# Altium PCB CAN_Optical.PcbDoc (part 1 of 2)
Units mm, origin at the board's own origin, x right, y up, seen from the top; angles counter-clockwise.
Board outline 152.4 x 127 mm, 4 copper layers (Top Layer, Power Plane, Ground Plane, Bottom Layer), stack 0.603 mm thick; 133 components, 52 nets, 740 pads, 182 vias.
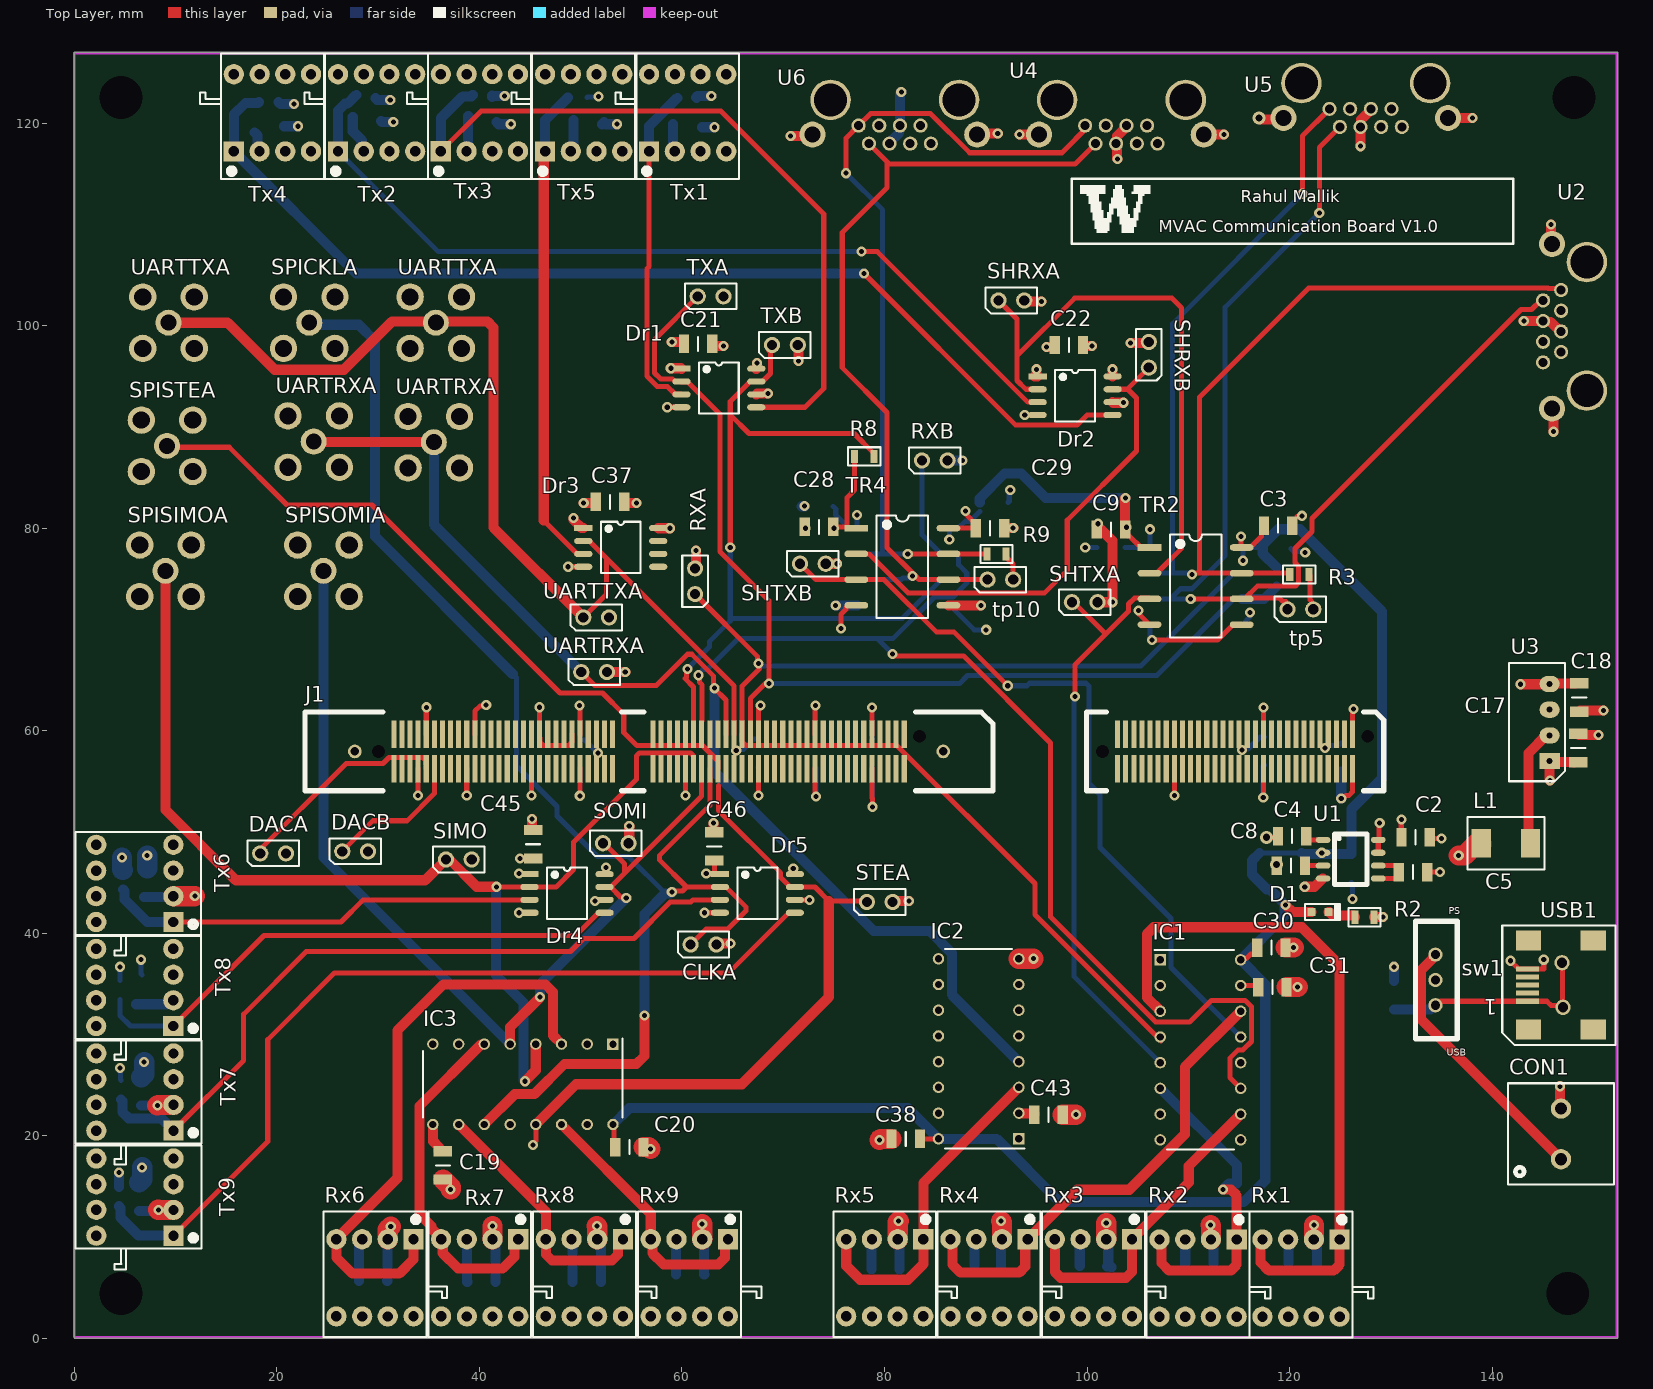
[diagram p0: Top Layer view]
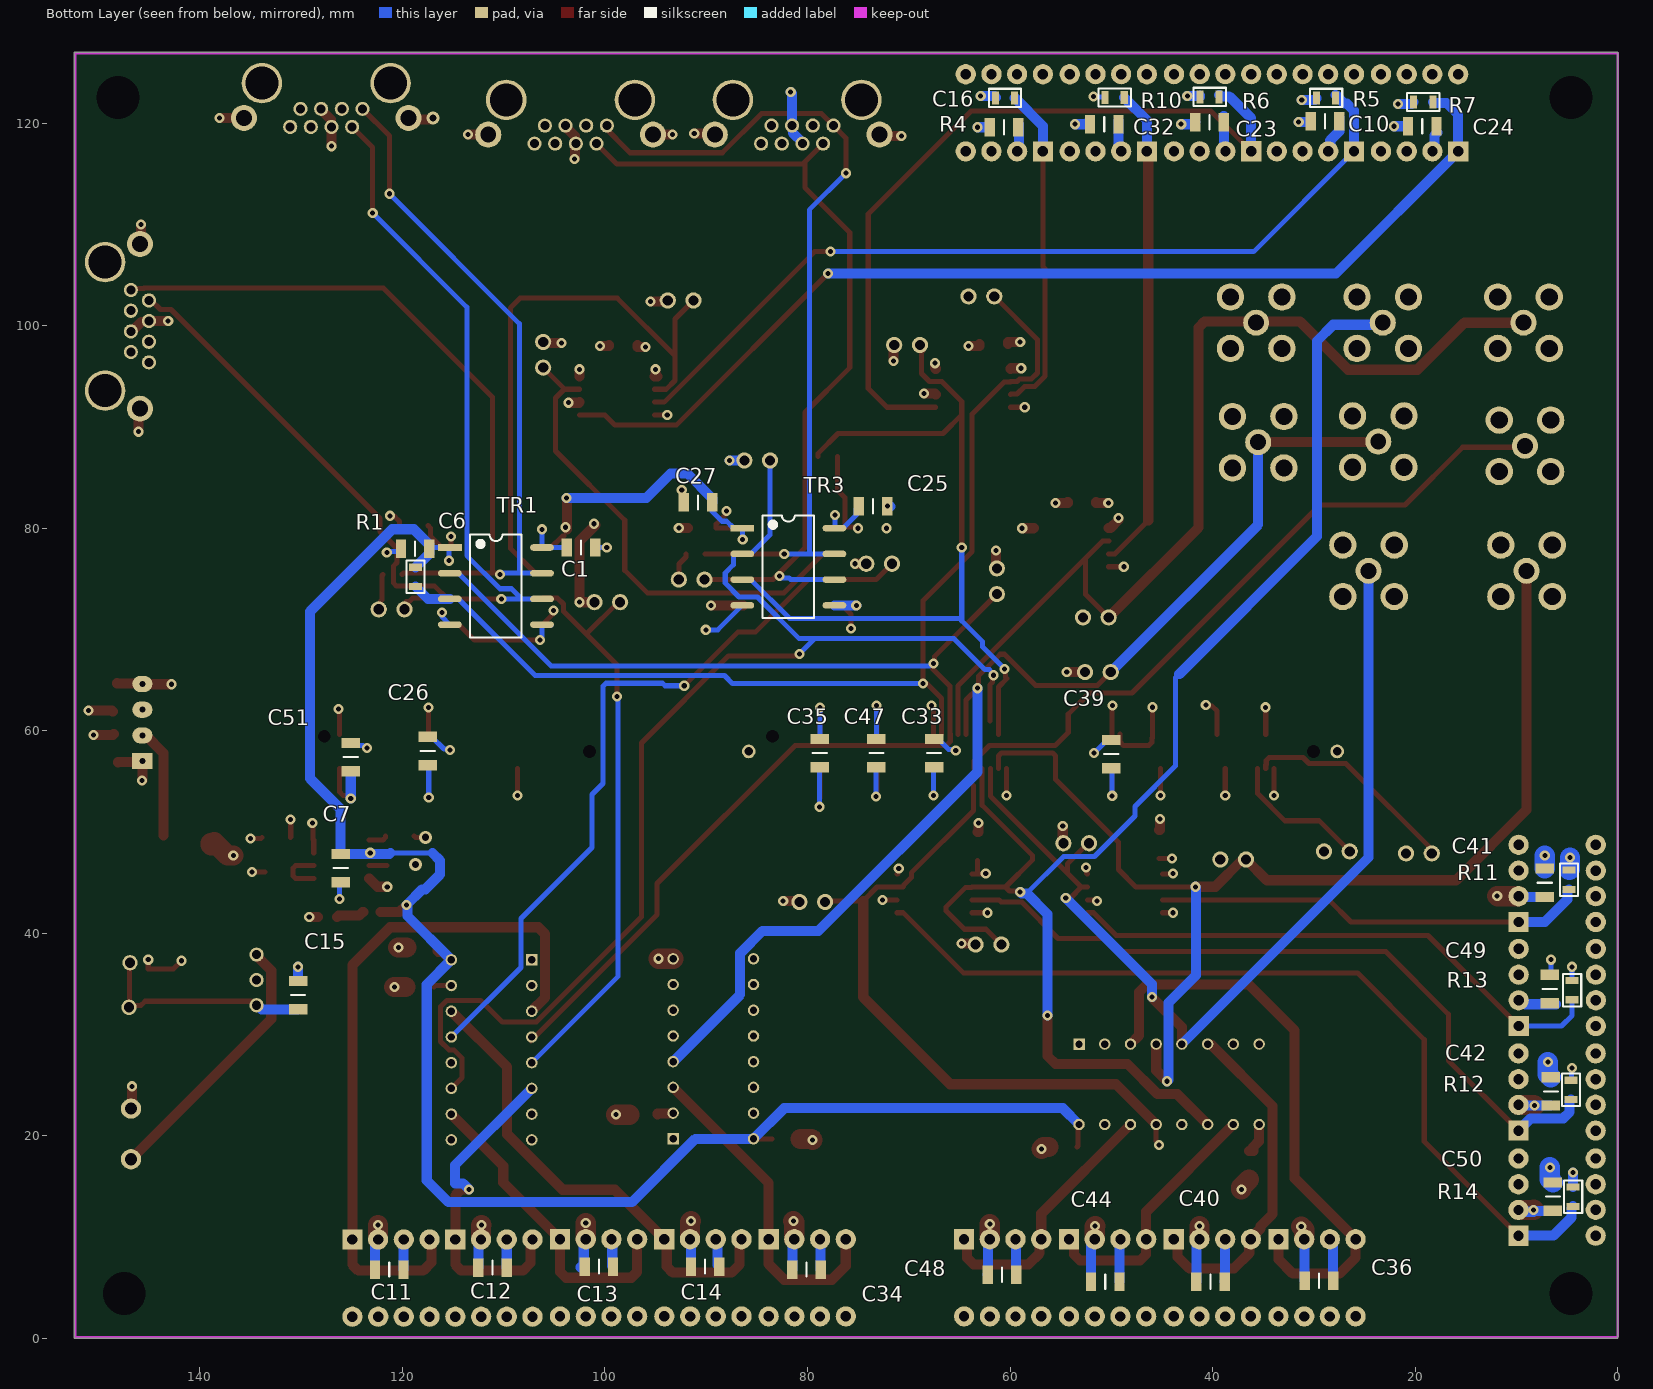
[diagram p1: Bottom Layer view, seen from below]
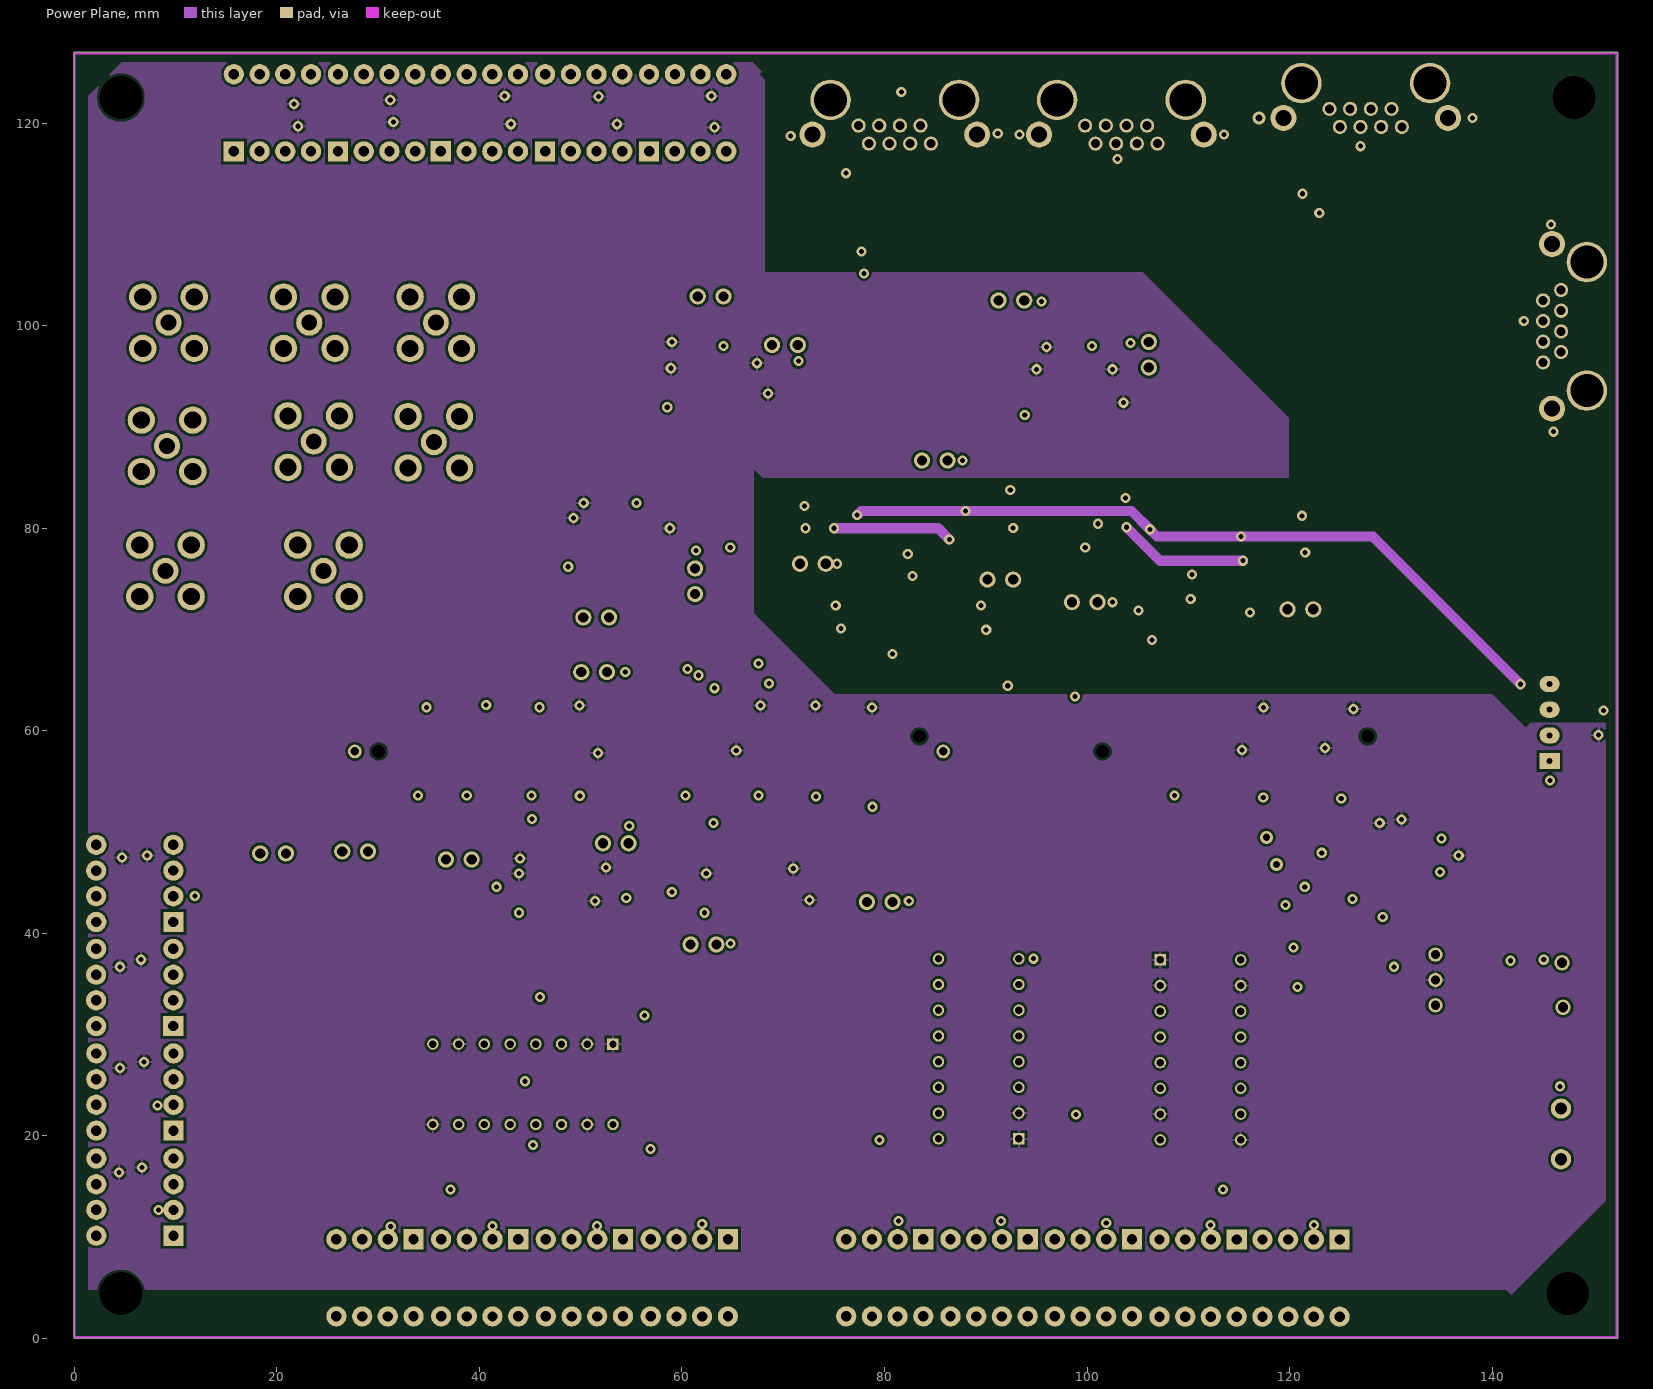
[diagram p2: Power Plane]
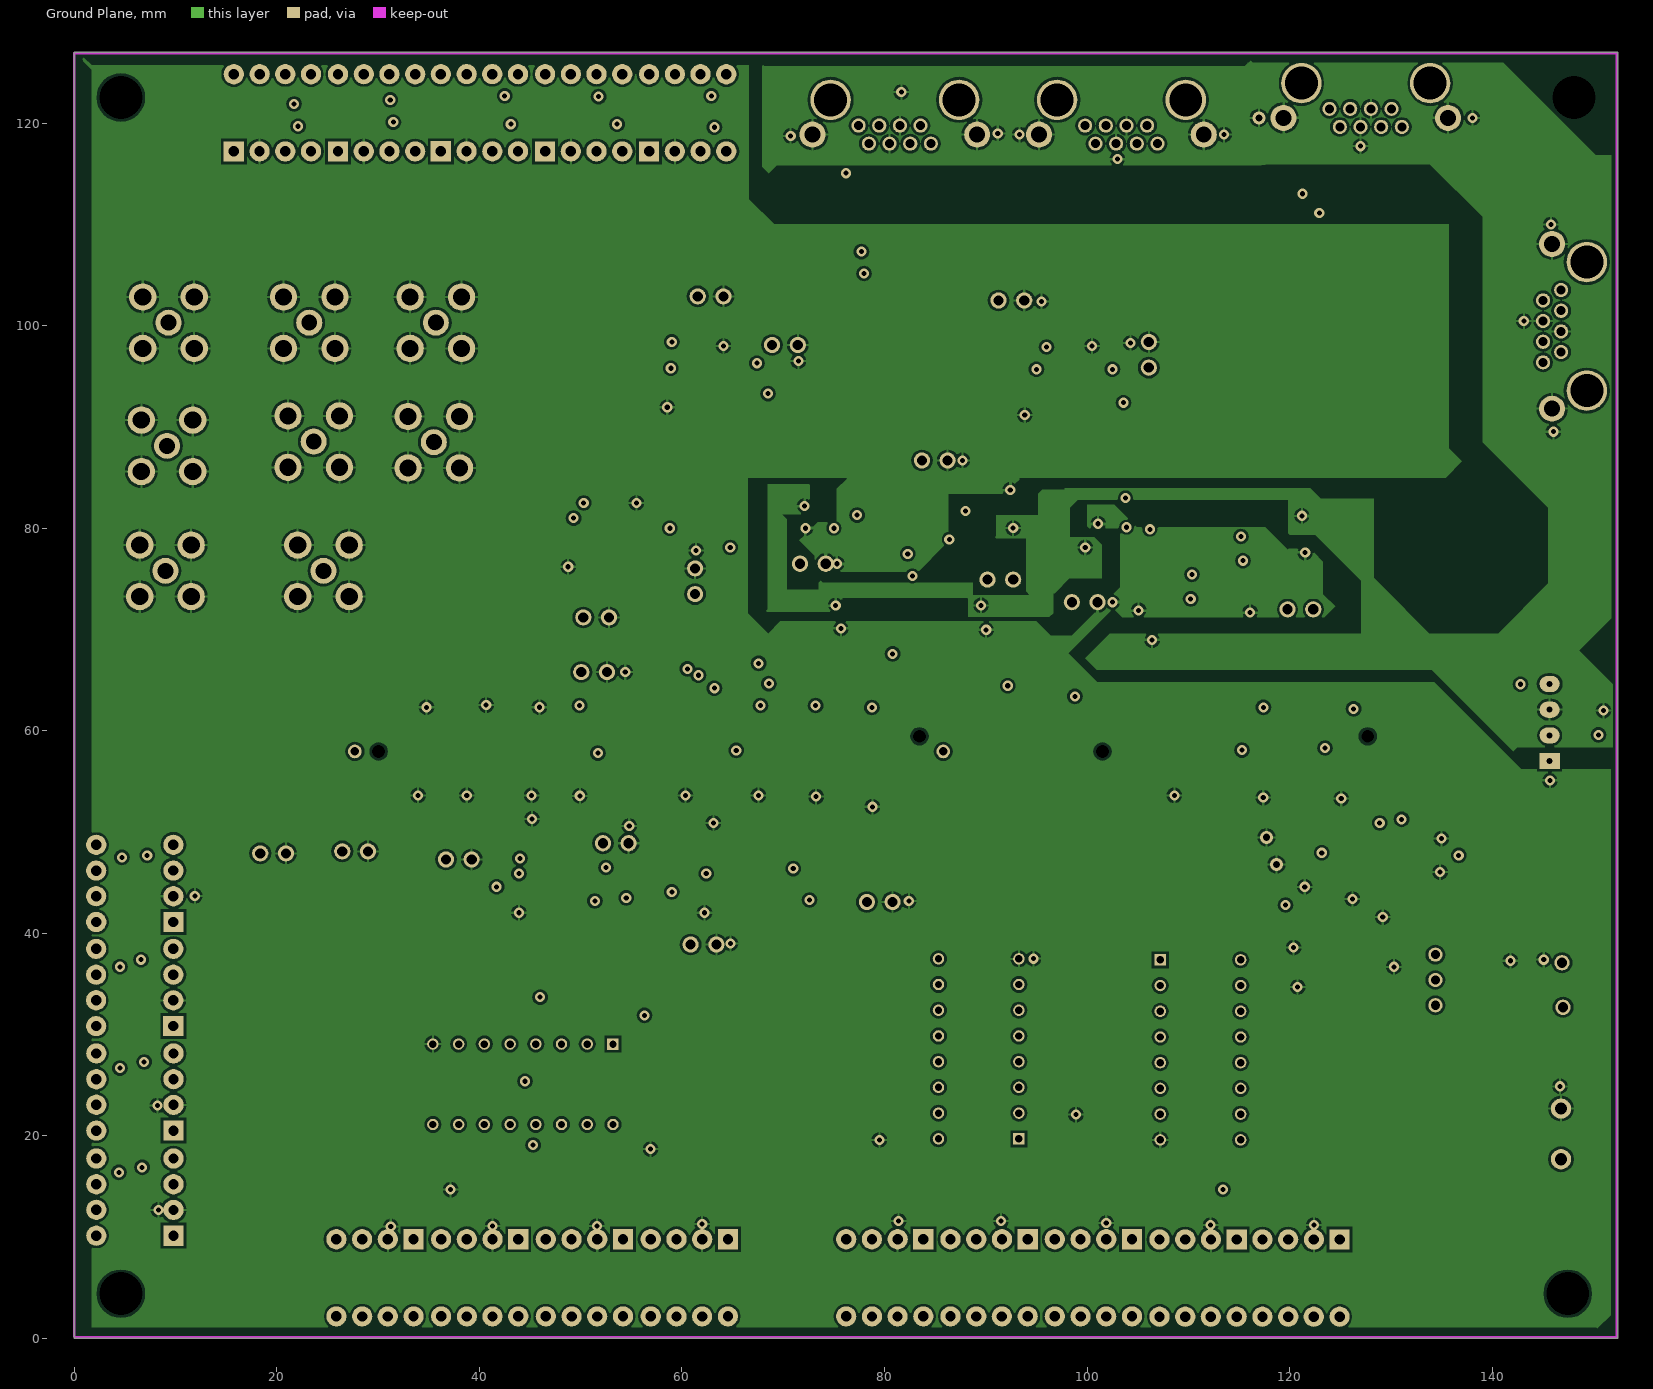
[diagram p3: Ground Plane]
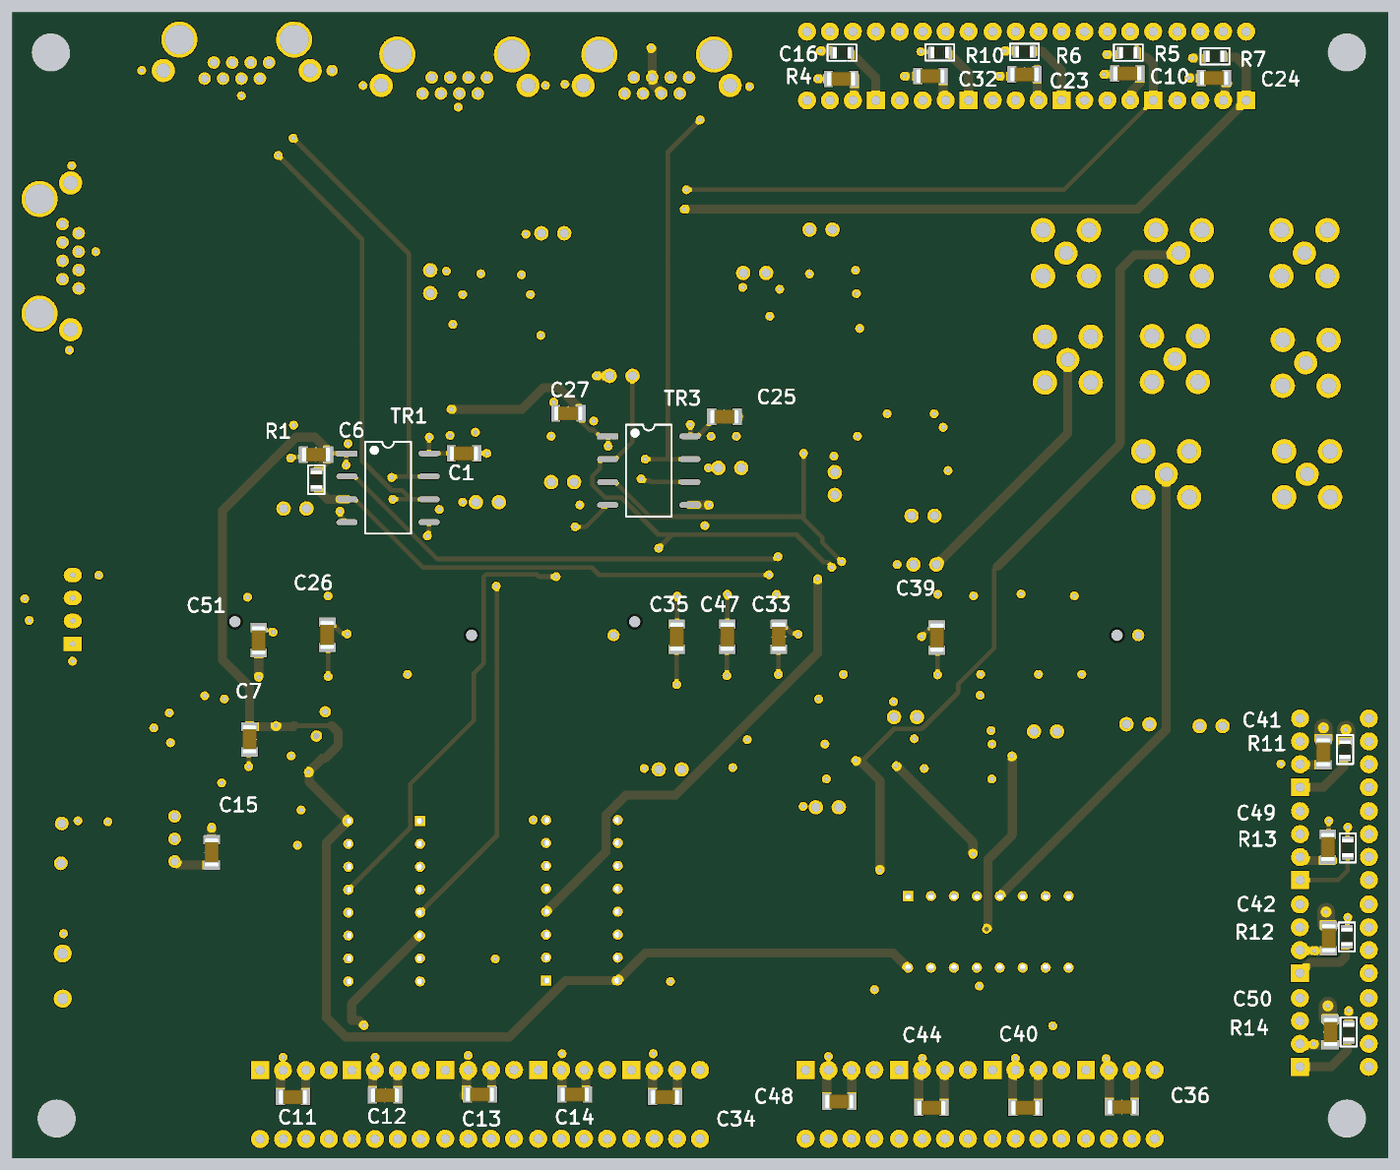
[diagram p5: 3D render of the assembled board from below, using the file's embedded part models]

## Layer stack, top to bottom
Top Solder: solder mask 0.0102, Solder Resist, Dk 3.5
Top Layer: signal copper 0.0356
Dielectric 2: prepreg 0.0711, PP-006, Dk 4.1
Power Plane: signal copper 0.035
Dielectric 1: dielectric 0.32, FR-4, Dk 4.8
Ground Plane: signal copper 0.035
Dielectric 3: prepreg 0.0711, PP-006, Dk 4.1
Bottom Layer: signal copper 0.0356
Bottom Solder: solder mask 0.0102, Solder Resist, Dk 3.5

## Board outline
0,0 152.4,0 152.4,127 0,127

## Design rules (kind name [scope] priority, off if disabled: settings)
Clearance [All] p1: gap=0.254 ignorepadtopadclearanceinfootprint=FALSE
ComponentClearance [All] p1 off: gap=0.254 collisioncheckmode=3 verticalgap=0.254 showdistances=FALSE
Height [All] p1 off: minheight=0 maxheight=25.4 prefheight=12.7
MinimumSolderMaskSliver [All] p1: minsoldermaskwidth=0.025
PolygonConnect [All] p1: connectstyle=Relief reliefconductorwidth=0.254 reliefentries=4 polygonreliefangle="90 Angle" airgapwidth=0.254
RoutingVias [All] p1: holewidth=0.5 width=1 viastyle="Through Hole" minholewidth=0.5 minwidth=1 maxholewidth=0.5 maxwidth=1
SilkToSilkClearance [All] p1: silktosilkclearance=0.025
SilkToSolderMaskClearance [IsPad] p1: minsilkscreentomaskgap=0.051 clearancetoexposedcopper=TRUE
SolderMaskExpansion [All] p1: expansion=0.102
Width [All] p1: maxlimit=2 minlimit=0.5 preferedwidth=1
25 further rules are at their usual default settings.

## Components (designator, comment, footprint, x,y, rotation, side; value= is the part's Value field where it differs from the comment)
C1 "C1206C104J5JACTU" CAPC3216X135N 102.359,78.105 r180 bottom
C2 "C1206C104J5JACTU" CAPC3216X135N 132.449,49.482 r0 top
C3 "C1206C104J5JACTU" CAPC3216X135N 118.872,80.264 r0 top
C4 "C1206C104J5JACTU" CAPC3216X135N 120.257,49.609 r180 top
C5 "C1206C104J5JACTU" CAPC3216X135N 132.195,46.053 r0 top
C6 "C1206C104J5JACTU" CAPC3216X135N 118.745,77.978 r0 bottom
C7 "C1206C104J5JACTU" CAPC3216X135N 126.099,46.434 r270 bottom
C8 "C1206C104J5JACTU" CAPC3216X135N 120.13,46.688 r180 top
C9 "C1206C104J5JACTU" CAPC3216X135N 102.365,79.883 r180 top
C10 "10uF" CAPC3216X135N 28.9,120.2 r180 bottom
C11 "0.1uF" CAPC3216X135N 121.3,6.8 r0 bottom
C12 "0.1uF" CAPC3216X135N 111.1,7 r0 bottom
C13 "0.1uF" CAPC3216X135N 100.6,7.1 r0 bottom
C14 "0.1uF" CAPC3216X135N 90.1,7.1 r0 bottom
C15 "C1206C104J5JACTU" CAPC3216X135N 130.3,33.9 r90 bottom
C16 "C1206C104J5JACTU" CAPC3216X135N 60.6,119.6 r180 bottom
C17 "C1206C104J5JACTU" CAPC3216X135N 148.5,58.3 r270 top
C18 "C1206C104J5JACTU" CAPC3216X135N 148.6,63.3 r270 top
C19 "C1206C104J5JACTU" CAPC3216X135N 36.4,17.1 r270 top
C20 "C1206C104J5JACTU" CAPC3216X135N 54.8,18.9 r0 top
C21 "C1206C104J5JACTU" CAPC3216X135N 61.6,98.2 r0 top
C22 "C1206C104J5JACTU" CAPC3216X135N 98.2,98.1 r0 top
C23 "C1206C104J5JACTU" CAPC3216X135N 40.3,120.1 r180 bottom
C24 "C1206C104J5JACTU" CAPC3216X135N 19.3,119.7 r180 bottom
C25 "C1206C104J5JACTU" CAPC3216X135N 73.53,82.169 r180 bottom
C26 "C1206C104J5JACTU" CAPC3216X135N 117.5,58 r270 bottom
C27 "C1206C104J5JACTU" CAPC3216X135N 90.805,82.55 r0 bottom
C28 "C1206C104J5JACTU" CAPC3216X135N 73.536,80.137 r180 top
C29 "C1206C104J5JACTU" CAPC3216X135N 90.424,80.01 r0 top
C30 "C1206C104J5JACTU" CAPC3216X135N 118.2,38.6 r0 top
C31 "C1206C104J5JACTU" CAPC3216X135N 118.3,34.7 r0 top
C32 "C1206C104J5JACTU" CAPC3216X135N 50.7,119.9 r180 bottom
C33 "C1206C104J5JACTU" CAPC3216X135N 67.5,57.8 r270 bottom
C34 "C1206C104J5JACTU" CAPC3216X135N 80.1,6.8 r0 bottom
C35 "C1206C104J5JACTU" CAPC3216X135N 78.8,57.8 r270 bottom
C36 "C1206C104J5JACTU" CAPC3216X135N 29.5,5.7 r0 bottom
C37 "C1206C104J5JACTU" CAPC3216X135N 52.9,82.6 r0 top
C38 "C1206C104J5JACTU" CAPC3216X135N 82.1,19.7 r180 top
C39 "C1206C104J5JACTU" CAPC3216X135N 50,57.7 r270 bottom
C40 "C1206C104J5JACTU" CAPC3216X135N 40.2,5.6 r0 bottom
C41 "C1206C104J5JACTU" CAPC3216X135N 7.2,45 r270 bottom
C42 "C1206C104J5JACTU" CAPC3216X135N 6.6,24.4 r270 bottom
C43 "C1206C104J5JACTU" CAPC3216X135N 96.2,22.1 r0 top
C44 "C1206C104J5JACTU" CAPC3216X135N 50.6,5.6 r0 bottom
C45 "C1206C104J5JACTU" CAPC3216X135N 45.3,48.8 r90 top
C46 "C1206C104J5JACTU" CAPC3216X135N 63.2,48.6 r90 top
C47 "C1206C104J5JACTU" CAPC3216X135N 73.2,57.8 r270 bottom
C48 "C1206C104J5JACTU" CAPC3216X135N 60.8,6.3 r0 bottom
C49 "C1206C104J5JACTU" CAPC3216X135N 6.7,34.5 r270 bottom
C50 "C1206C104J5JACTU" CAPC3216X135N 6.4,14 r270 bottom
C51 "C1206C104J5JACTU" CAPC3216X135N 125.1,57.4 r270 bottom
CLKA "tp2" tp2 60.86,38.9 r0 top (schematic designator tp15)
CON1 "ED700/2" ED700/2 146.8,17.7 r90 top
D1 "GREEN" LED0603G 123,42.1 r180 top
DACA "tp2" tp2 18.36,47.9 r0 top (schematic designator tp17)
DACB "tp2" tp2 26.46,48.1 r0 top (schematic designator tp18)
Dr1 "SN75451BPSRG4" SN75451BPS 59.944,95.758 r0 top
Dr2 "SN75451BPSRG4" SN75451BPS 95.123,94.996 r0 top
Dr3 "SN75451BPSRG4" SN75451BPS 50.258,80.01 r0 top
Dr4 "SN75451BPSRG4" SN75451BPS 44.958,45.847 r0 top
Dr5 "SN75451BPSRG4" SN75451BPS 63.754,45.847 r0 top
IC1 "CD40109BE" DIP794W53P254L1930H508Q16N 111.2,28.5 r0 top
IC2 "CD40109BE" DIP794W53P254L1930H508Q16N 89.3,28.6 r180 top
IC3 "CD40109BE" DIP794W53P254L1930H508Q16N 44.3,25.1 r270 top
J1 "HEADER_HSEC8_180_VERT" HEADER_HSEC8_180_DV 31.552,56.261 r0 top
L1 "IHLP2020BZER4R7M11" L_IHLP2020BZER4R7M11 141.351,48.895 r0 top
R1 "10K" "R0805 - duplicate - duplicate" 118.7,75.2 r270 bottom
R2 "360R" "R0805 - duplicate - duplicate" 127.4,41.6 r180 top
R3 "120R" "R0805 - duplicate - duplicate" 120.965,75.438 r0 top
R4 "100R" "R0805 - duplicate - duplicate" 60.5,122.5 r180 bottom
R5 "100R" "R0805 - duplicate - duplicate" 28.8,122.5 r180 bottom
R6 "100R" "R0805 - duplicate - duplicate" 40.3,122.6 r180 bottom
R7 "100R" "R0805 - duplicate - duplicate" 19.2,122.1 r180 bottom
R8 "10K" "R0805 - duplicate - duplicate" 78,87.1 r0 top
R9 "120R" "R0805 - duplicate - duplicate" 91.059,77.47 r0 top
R10 "100R" "R0805 - duplicate - duplicate" 49.675,122.525 r180 bottom
R11 "100R" "R0805 - duplicate - duplicate" 4.8,45.3 r270 bottom
R12 "100R" "R0805 - duplicate - duplicate" 4.6,24.55 r270 bottom
R13 "100R" "R0805 - duplicate - duplicate" 4.5,34.4 r270 bottom
R14 "100R" "R0805 - duplicate - duplicate" 4.4,14 r270 bottom
Rx1 "HFBR-2521Z" HFBRX5XXZ 124.94,9.775 r270 top
Rx2 "HFBR-2521Z" HFBRX5XXZ 114.775,9.775 r270 top
Rx3 "HFBR-2521Z" HFBRX5XXZ 104.44,9.8 r270 top
Rx4 "HFBR-2521Z" HFBRX5XXZ 94.14,9.8 r270 top
Rx5 "HFBR-2521Z" HFBRX5XXZ 83.84,9.8 r270 top
Rx6 "HFBR-2521Z" HFBRX5XXZ 33.5,9.8 r270 top
Rx7 "HFBR-2521Z" HFBRX5XXZ 43.84,9.8 r270 top
Rx8 "HFBR-2521Z" HFBRX5XXZ 54.18,9.8 r270 top
Rx9 "HFBR-2521Z" HFBRX5XXZ 64.54,9.8 r270 top
RXA "tp2" tp2 61.3,73.5 r90 top (schematic designator tp1)
RXB "tp2" tp2 83.7,86.7 r0 top (schematic designator tp6)
SHRXA "tp2" tp2 91.26,102.5 r0 top (schematic designator tp2)
SHRXB "tp2" tp2 106.1,95.86 r90 top (schematic designator tp7)
SHTXA "tp2" tp2 98.5,72.7 r0 top (schematic designator tp4)
SHTXB "tp2" tp2 71.66,76.5 r0 top (schematic designator tp9)
SIMO "tp2" tp2 36.7,47.3 r0 top (schematic designator tp13)
SOMI "tp2" tp2 52.2,48.9 r0 top (schematic designator tp14)
SPICKLA "142-0701-201" 142-0701-201 23.2,100.3 r0 top (schematic designator sma13)
SPISIMOA "142-0701-201" 142-0701-201 9,75.8 r0 top (schematic designator sma11)
SPISOMIA "142-0701-201" 142-0701-201 24.6,75.8 r0 top (schematic designator sma12)
SPISTEA "142-0701-201" 142-0701-201 9.16,88.14 r0 top (schematic designator sma14)
STEA "tp2" tp2 78.26,43.1 r0 top (schematic designator tp16)
sw1 "EG1218" EG1218 134.4,37.9 r270 top
tp5 "tp2" tp2 119.8,72 r0 top
tp10 "tp2" tp2 90.17,74.93 r0 top
TR1 "Transceiver" RXTX_ISO1050 115.316,78.105 r180 bottom
TR2 "Transceiver" RXTX_ISO1050 106.172,78.105 r0 top
TR3 "Transceiver" RXTX_ISO1050 86.443,80.01 r180 bottom
TR4 "Transceiver" RXTX_ISO1050 77.216,80.01 r0 top
Tx1 "HFBR-1527Z" HFBRX5XXZ 56.759,117.216 r90 top
Tx2 "HFBR-1527Z" HFBRX5XXZ 26.04,117.216 r90 top
Tx3 "HFBR-1527Z" HFBRX5XXZ 36.195,117.221 r90 top
Tx4 "HFBR-1527Z" HFBRX5XXZ 15.753,117.216 r90 top
Tx5 "HFBR-1527Z" HFBRX5XXZ 46.487,117.216 r90 top
Tx6 "HFBR-1527Z" HFBRX5XXZ 9.784,41.123 r180 top
Tx7 "HFBR-1527Z" HFBRX5XXZ 9.798,20.525 r180 top
Tx8 "HFBR-1527Z" HFBRX5XXZ 9.779,30.846 r180 top
Tx9 "HFBR-1527Z" HFBRX5XXZ 9.798,10.15 r180 top
TXA "tp2" tp2 61.56,102.9 r0 top (schematic designator tp3)
TXB "tp2" tp2 68.9,98.1 r0 top (schematic designator tp8)
U1 "ADM7154ARDZ-3.3-R7" ADM7154ARDZ-3.3-R7 126.03,47.323 r0 top
U2 "1-406541-1" 1-406541-1 145.032,96.381 r90 top
U3 "ROE-0505S" RECOM_DCDC 145.682,60.82 r180 top
U4 "1-406541-1" 1-406541-1 106.954,117.981 r180 top
U5 "1-406541-1" 1-406541-1 131.084,119.632 r180 top
U6 "1-406541-1" 1-406541-1 84.582,117.983 r180 top
UARTRXA "tp2" tp2 50.06,65.8 r0 top (schematic designator tp12)
UARTRXA "142-0701-201" 142-0701-201 23.64,88.56 r0 top (schematic designator sma16)
UARTRXA "142-0701-201" 142-0701-201 35.5,88.5 r0 top (schematic designator sma10)
UARTTXA "tp2" tp2 50.26,71.2 r0 top (schematic designator tp11)
UARTTXA "142-0701-201" 142-0701-201 35.7,100.3 r0 top (schematic designator sma15)
UARTTXA "142-0701-201" 142-0701-201 9.3,100.3 r0 top (schematic designator sma9)
USB1 "1734035-3" ? 143.5,34.9 r90 top

## Footprints (in the part's own frame and the unit in brackets; to place one, negate y for a bottom-side part, rotate by r counter-clockwise, add the part's x,y. Pads: shape width x height; smd on the part's side, far side on the other; paste and mask are expansions set on the pad)
1-406541-1 [mm] "Jack Modular Connector 8p8c (RJ45, Ethernet) 90° Angle (Right) Shielded, EMI Finger Cat5"
  round 1.4 hole 0.89: 1(7.14,-1.78) 2(6.12,0) 3(5.1,-1.78) 4(4.08,0) 5(3.06,-1.78) 6(2.04,0) 7(1.02,-1.78) 8(0,0)
  round 2.57 hole 1.57: 9(-4.57,-0.89) 9(11.69,-0.89)
  round 4 hole 3.25: 10(-2.79,-4.32) 10(9.91,-4.32)
142-0701-201 [mm]
  round 2.57 hole 1.57: 1(0,0)
  round 2.7 hole 1.7: 2(-2.54,-2.54) 2(-2.54,2.54) 2(2.54,-2.54) 2(2.54,2.54)
ADM7154ARDZ-3.3-R7 [mm]
  oval 1.45x0.6 smd: 1(-2.725,1.905) 2(-2.725,0.635) 3(-2.725,-0.635) 4(-2.725,-1.905) 5(2.725,-1.905) 6(2.725,-0.635) 7(2.725,0.635) 8(2.725,1.905)
  silkscreen extent -1.6,-2.5 1.6,2.5, body extent -2,-2.5 2,2.5, height 0.8
CAPC3216X135N [mm]
  rect 1.02x1.82 smd: 1(-1.4,0) 2(1.4,0)
  silkscreen extent 0,-0.7 0,0.7, body extent -1.6,-0.8 1.6,0.8, height 1.35
DIP794W53P254L1930H508Q16N [mm]
  rect 1.13x1.13 hole 0.73: 1(-3.97,8.89)
  round 1.13 hole 0.73: 2(-3.97,6.35) 3(-3.97,3.81) 4(-3.97,1.27) 5(-3.97,-1.27) 6(-3.97,-3.81) 7(-3.97,-6.35) 8(-3.97,-8.89) 9(3.97,-8.89) 10(3.97,-6.35) 11(3.97,-3.81) 12(3.97,-1.27) 13(3.97,1.27) 14(3.97,3.81) 15(3.97,6.35) 16(3.97,8.89)
  silkscreen extent -4.53,-9.84 3.3,9.84, body extent -4.1,-9.65 4.1,9.65, height 5.08
ED700/2 [mm]
  round 2 hole 1.2: 1(0,0) 2(5,0)
  silkscreen extent -2.5,-5.25 7.5,5.25
EG1218 [mm] "SWITCH SLIDE SPDT 200MA 30V"
  round 1.4 hole 0.9: 1(0,0) 2(2.5,0) 3(5,0)
  silkscreen extent -3.3,-1.97 8.3,2.16
HEADER_HSEC8_180_DV [mm]
  rect 0.5x2.724 smd mask+0.076: 1(0,0) 2(0,3.4) 3(0.8,0) 4(0.8,3.4) 5(1.6,0) 6(1.6,3.4) 7(2.4,0) 8(2.4,3.4) 9(3.2,0) 10(3.2,3.4) 11(4,0) 12(4,3.4) 13(4.8,0) 14(4.8,3.4) 15(5.6,0) 16(5.6,3.4) 17(6.4,0) 18(6.4,3.4) 19(7.2,0) 20(7.2,3.4) 21(8,0) 22(8,3.4) 23(8.8,0) 24(8.8,3.4) 25(9.6,0) 26(9.6,3.4) 27(10.4,0) 28(10.4,3.4) 29(11.2,0) 30(11.2,3.4) 31(12,0) 32(12,3.4) 33(12.8,0) 34(12.8,3.4) 35(13.6,0) 36(13.6,3.4) 37(14.4,0) 38(14.4,3.4) 39(15.2,0) 40(15.2,3.4) 41(16,0) 42(16,3.4) 43(16.8,0) 44(16.8,3.4) 45(17.6,0) 46(17.6,3.4) 47(18.4,0) 48(18.4,3.4) 49(19.2,0) 50(19.2,3.4) 51(20,0) 52(20,3.4) 53(20.8,0) 54(20.8,3.4) 55(21.6,0) 56(21.6,3.4) 57(25.6,0) 58(25.6,3.4) 59(26.4,0) 60(26.4,3.4) 61(27.2,0) 62(27.2,3.4) 63(28,0) 64(28,3.4) 65(28.8,0) 66(28.8,3.4) 67(29.6,0) 68(29.6,3.4) 69(30.4,0) 70(30.4,3.4) 71(31.2,0) 72(31.2,3.4) 73(32,0) 74(32,3.4) 75(32.8,0) 76(32.8,3.4) 77(33.6,0) 78(33.6,3.4) 79(34.4,0) 80(34.4,3.4) 81(35.2,0) 82(35.2,3.4) 83(36,0) 84(36,3.4) 85(36.8,0) 86(36.8,3.4) 87(37.6,0) 88(37.6,3.4) 89(38.4,0) 90(38.4,3.4) 91(39.2,0) 92(39.2,3.4) 93(40,0) 94(40,3.4) 95(40.8,0) 96(40.8,3.4) 97(41.6,0) 98(41.6,3.4) 99(42.4,0) 100(42.4,3.4) 101(43.2,0) 102(43.2,3.4) 103(44,0) 104(44,3.4) 105(44.8,0) 106(44.8,3.4) 107(45.6,0) 108(45.6,3.4) 109(46.4,0) 110(46.4,3.4) 111(47.2,0) 112(47.2,3.4) 113(48,0) 114(48,3.4) 115(48.8,0) 116(48.8,3.4) 117(49.6,0) 118(49.6,3.4) 119(50.4,0) 120(50.4,3.4) 121(71.468,0) 122(71.468,3.4) 123(72.268,0) 124(72.268,3.4) 125(73.068,0) 126(73.068,3.4) 127(73.868,0) 128(73.868,3.4) 129(74.668,0) 130(74.668,3.4) 131(75.468,0) 132(75.468,3.4) 133(76.268,0) 134(76.268,3.4) 135(77.068,0) 136(77.068,3.4) 137(77.868,0) 138(77.868,3.4) 139(78.668,0) 140(78.668,3.4) 141(79.468,0) 142(79.468,3.4) 143(80.268,0) 144(80.268,3.4) 145(81.068,0) 146(81.068,3.4) 147(81.868,0) 148(81.868,3.4) 149(82.668,0) 150(82.668,3.4) 151(83.468,0) 152(83.468,3.4) 153(84.268,0) 154(84.268,3.4) 155(85.068,0) 156(85.068,3.4) 157(85.868,0) 158(85.868,3.4) 159(86.668,0) 160(86.668,3.4) 161(87.468,0) 162(87.468,3.4) 163(88.268,0) 164(88.268,3.4) 165(89.068,0) 166(89.068,3.4) 167(89.868,0) 168(89.868,3.4) 169(90.668,0) 170(90.668,3.4) 171(91.468,0) 172(91.468,3.4) 173(92.268,0) 174(92.268,3.4) 175(93.068,0) 176(93.068,3.4) 177(93.868,0) 178(93.868,3.4) 179(94.668,0) 180(94.668,3.4)
  round 0.025 hole 1.27 unplated mask+0.876: 181(-1.5,1.7) 182(51.9,3.2) 183(69.968,1.7) 184(96.168,3.2)
  round 1.348 hole 0.84: 185(-3.85,1.7) 186(54.25,1.7)
  silkscreen extent -8.76,-2.18 97.75,5.58
HFBRX5XXZ [mm]
  rect 2x2 hole 1.02: 1(0,0)
  round 2 hole 1.02: 2(0,-2.54) 3(0,-5.08) 4(0,-7.62) 5(7.62,-7.62) 6(7.625,-5.075) 7(7.625,-2.55) 8(7.62,0)
  silkscreen extent -2.75,-8.89 9.67,3.33
L_IHLP2020BZER4R7M11 [mm]
  rect 1.9x2.79 smd: 1(-2.425,0) 2(2.426,0)
  silkscreen extent -3.77,-2.6 3.83,2.6
LED0603G [mm]
  rect 0.8x0.8 smd: 1(-0.825,0) 2(0.825,0)
  silkscreen extent -2,-0.8 1.5,0.8, body extent -0.8,-0.4 0.8,0.4, height 0.4
"R0805 - duplicate - duplicate" [mm]
  rect 0.7x1.3 smd: 1(-0.95,0) 2(0.95,0)
  silkscreen extent -1.6,-0.9 1.6,0.9, body extent -1,-0.63 1,1.2, height 0.61
RECOM_DCDC [mm]
  rect 2x1.6 hole 0.6: 1(0,3.81)
  oval 2x1.6 hole 0.6: 2(0,1.27) 3(0,-1.27) 4(0,-3.81)
  silkscreen extent -1.5,-5.9 4,5.8
RXTX_ISO1050 [mm]
  rect 2.35x0.65 smd: 1(0,0)
  oval 2.35x0.65 smd: 2(0,-2.54) 3(0,-5.08) 4(0,-7.62) 5(9.1,-7.62) 6(9.1,-5.08) 7(9.1,-2.54) 8(9.1,0)
  silkscreen extent 2.01,-8.89 7.09,1.27
SN75451BPS [mm]
  rect 1.8x0.6 smd: 1(0,0)
  oval 1.8x0.6 smd: 2(0,-1.27) 3(0,-2.54) 4(0,-3.81) 5(7.4,-3.81) 6(7.4,-2.54) 7(7.4,-1.27) 8(7.4,0)
  silkscreen extent 1.73,-4.44 5.67,0.64
tp2 [mm]
  round 1.6 hole 1: 1(0,0) 2(2.54,0)
  silkscreen extent -1.27,-1.27 3.81,1.27
? [mm]
  round 1.524 hole 1 unplated: 1(-2.2,-3.5) 1(2.2,-3.4)
  rect 0.5x2.3 smd: 1(-1.6,0) 2(-0.8,0) 3(0,0) 4(0.8,0) 5(1.6,0)
  rect 2x2.5 smd: 6(-4.4,-0.1) 7(-4.4,-6.5) 8(4.4,-0.1) 9(4.4,-6.5)
  silkscreen extent -5.9,-8.7 5.9,2.5

## Part data
C1 C2 C3 C4 C5 C6 C7 C8 C9 C15 C16 C17 C18 C19 C20 C21 C22 C23 C24 C25 C26 C27 C28 C29 C30 C31 C32 C33 C34 C35 C36 C37 C38 C39 C40 C41 C42 C43 C44 C45 C46 C47 C48 C49 C50 C51: "Capacitor", Manufacturer_Name=Kemet, Datasheet Link=https://api.kemet.com/component-edge/download/datasheet/C1206C104J5JACTU.pdf, Height=1.35mm, Manufacturer_Part_Number=C1206C104J5JACTU
C10 C11 C12 C13 C14: library part C0603C104K8RACTU, "KEMET - C0603C104K8RACTU - SMD Multilayer Ceramic Capacitor, 0.1 µF, 10 V, 0603 [1608 Metric], ± 10%, X7R, C Series KEMET", Capacitance=100nF, Case Code (Imperial)=0603, Case Code (Metric)=1608, Dielectric=X7R, Dielectric Material=Ceramic, Manufacturer=KEMET, Max Operating Temperature=125°C, Min Operating Temperature=-55°C, Package Quantity=1, Tolerance=10%, Voltage=10V, Case/Package=0603, Category="Multilayer Ceramic Capacitors MLCC", ComponentLink1Description=http://www.farnell.com/datasheets/2740421.pdf?src-supplier=Farnell, ComponentLink1URL=http://www.farnell.com/datasheets/2740421.pdf?src-supplier=Farnell, ComponentLink2Description=http://www.kemet.com/kemet/web/homepage/kechome.nsf/vapubfiles/KEM_C1002_X7R_SMD.pdf/$file/KEM_C1002_X7R_SMD.pdf?src-supplier=Element14, ComponentLink2URL=http://www.kemet.com/kemet/web/homepage/kechome.nsf/vapubfiles/KEM_C1002_X7R_SMD.pdf/$file/KEM_C1002_X7R_SMD.pdf?src-supplier=Element14, ComponentLink3Description=https://www.verical.com/server-webapp/html/getDatasheet?partID=91529&src-supplier=Verical, ComponentLink3URL=https://www.verical.com/server-webapp/html/getDatasheet?partID=91529&src-supplier=Verical, ComponentLink4Description=http://www.mouser.com/ds/2/212/KEM_C1002_X7R_SMD-1102033.pdf?src-supplier=Mouser, ComponentLink4URL=http://www.mouser.com/ds/2/212/KEM_C1002_X7R_SMD-1102033.pdf?src-supplier=Mouser, ComponentLink5Description=http://www.alliedelec.com/m/d/9bfe7773041ffe9d406e68bc7b377fdd.pdf?src-supplier=Allied+Electronics, ComponentLink5URL=http://www.alliedelec.com/m/d/9bfe7773041ffe9d406e68bc7b377fdd.pdf?src-supplier=Allied+Electronics, ComponentLink6Description=http://www.farnell.com/datasheets/2740421.pdf?src-supplier=Element14, ComponentLink6URL=http://www.farnell.com/datasheets/2740421.pdf?src-supplier=Element14, Contact Plating=Tin,Matte, Depth=0.8mm, Dissipation Factor=5%, Height=0.8mm, Lead Pitch=0.7mm, Length=1.6mm, Manufacturer Part Number=C0603C104K8RACTU, Mount="Surface Mount,PCB", Number of Pins=2, Packaging="Tape and Reel", Pricing 1="1=0.14, 10=0.098, 100=0.0462, 500=0.0324, 1000=0.02683 (USD)", Radiation Hardening=No, REACH SVHC="No SVHC", Stock 1=311118, Supplier 1=Digi-Key, Termination=SMD/SMT, Thickness=0.034inch, Voltage Rating=10V, Voltage Rating (DC)=10V, Width=0.8mm
CLKA DACA DACB RXA RXB SHRXA SHRXB SHTXA SHTXB SIMO SOMI STEA tp5 tp10 TXA TXB UARTRXA UARTTXA: Digi-Key Part Number=S1012EC-10-ND
CON1: Digi-Key Part Number=ED1631-ND
D1: library part ERJ-3EKF8062V, "PANASONIC - ERJ3EKF8062V - Surface Mount Thick Film Resistor, AEC-Q200 ERJ Series, 80.6 kohm, 100 mW, -  1%, 75 V RoHS Compliant: Yes", Case Code (Imperial)=0603, Case Code (Metric)=1608, Manufacturer 1=Panasonic, Max Operating Temperature=155°C, Max Power Dissipation=100mW, Min Operating Temperature=-55°C, Package Quantity=1, Resistance=80.6kR, Supplier Part Number 1=P80.6KHCT-ND, Temperature Coefficient=100ppm/°C, Tolerance=1%, Voltage Rating=75V, Case/Package=0603, Category=Optoelectronics, ComponentLink1Description=https://datasheet.ciiva.com/34303/1988428-34303606.pdf?src-supplier=Jameco, ComponentLink1URL=https://datasheet.ciiva.com/34303/1988428-34303606.pdf?src-supplier=Jameco, ComponentLink2Description=https://datasheet.ciiva.com/26820/getdatasheetpartid-28772-26820919.pdf?src-supplier=Verical, ComponentLink2URL=https://datasheet.ciiva.com/26820/getdatasheetpartid-28772-26820919.pdf?src-supplier=Verical, ComponentLink3Description=https://datasheet.ciiva.com/28540/1678782-28540761.pdf?src-supplier=Element14, ComponentLink3URL=https://datasheet.ciiva.com/28540/1678782-28540761.pdf?src-supplier=Element14, ComponentLink4Description=https://datasheet.ciiva.com/30240/aoa0000ce2-30240122.pdf?src-supplier=Onlinecomponents.com, ComponentLink4URL=https://datasheet.ciiva.com/30240/aoa0000ce2-30240122.pdf?src-supplier=Onlinecomponents.com, ComponentLink5Description=https://datasheet.ciiva.com/9117/aoa0000ce2-9117181.pdf?src-supplier=Avnet, ComponentLink5URL=https://datasheet.ciiva.com/9117/aoa0000ce2-9117181.pdf?src-supplier=Avnet, ComponentLink6Description=https://datasheet.ciiva.com/16767/70260748-16767567.pdf?src-supplier=Allied+Electronics, ComponentLink6URL=https://datasheet.ciiva.com/16767/70260748-16767567.pdf?src-supplier=Allied+Electronics, ComponentLink7Description=https://datasheet.ciiva.com/16771/70260748-16771423.pdf?src-supplier=Allied+Electronics, ComponentLink7URL=https://datasheet.ciiva.com/16771/70260748-16771423.pdf?src-supplier=Allied+Electronics, ComponentLink8Description=https://datasheet.ciiva.com/24069/aoa0000ce2-24069717.pdf?src-supplier=Mouser, ComponentLink8URL=https://datasheet.ciiva.com/24069/aoa0000ce2-24069717.pdf?src-supplier=Mouser, ComponentLink9Description=https://datasheet.ciiva.com/43460/426256-43460613.pdf?src-supplier=Farnell, ComponentLink9URL=https://datasheet.ciiva.com/43460/426256-43460613.pdf?src-supplier=Farnell, ComponentLink10Description=https://datasheet.ciiva.com/46390/426256-46390277.pdf?src-supplier=Element14, ComponentLink10URL=https://datasheet.ciiva.com/46390/426256-46390277.pdf?src-supplier=Element14, ComponentLink11Description=https://datasheet.ciiva.com/46378/426256-46378107.pdf?src-supplier=Element14, ComponentLink11URL=https://datasheet.ciiva.com/46378/426256-46378107.pdf?src-supplier=Element14, ComponentLink12Description=https://datasheet.ciiva.com/17208/aoa0000ce2-17208604.pdf?src-supplier=Avnet+Europe, ComponentLink12URL=https://datasheet.ciiva.com/17208/aoa0000ce2-17208604.pdf?src-supplier=Avnet+Europe, ComponentLink13Description=https://datasheet.ciiva.com/6159/426256-6159621.pdf?src-supplier=Farnell, ComponentLink13URL=https://datasheet.ciiva.com/6159/426256-6159621.pdf?src-supplier=Farnell, Composition="Thick Film", Contact Plating=Tin, Depth=0.8mm, Features="Automotive AEC-Q200", Height=0.45mm, Length=1.6mm, Manufacturer Part Number 1=ERJ-3EKF8062V, Military Standard=Not, Mount="Surface Mount", Number of Terminations=2, Packaging="Tape and Reel", Power Rating=100mW, Pricing 1="1=0.10000, 10=0.05700, 100=0.02340, 1000=0.01049, 2500=0.00911 (USD)", Radiation Hardening=No, REACH SVHC="No SVHC", RoHS=Yes, Stock 1=56636, Supplier 1=Digi-Key, Termination=SMD/SMT, Width=0.8mm
Dr1 Dr2 Dr3 Dr4 Dr5: "IC DUAL PERIPHERAL DRVR 8-SOP", Case/Package=SOP, Manufacturer="Texas Instruments", Max Input Voltage=5.5V, Max Operating Temperature=70°C, Max Supply Current=65mA, Min Operating Temperature=0°C, Operating Supply Voltage=5.25V, Output Current=300mA, Output Voltage=30V, Package Quantity=2000, Category="Buffers & Line Drivers", ComponentLink1Description=https://www.verical.com/server-webapp/html/getDatasheet?partID=528972&src-supplier=Verical, ComponentLink1URL=https://www.verical.com/server-webapp/html/getDatasheet?partID=528972&src-supplier=Verical, ComponentLink2Description=http://www.ti.com/lit/ds/symlink/sn75462.pdf?src-supplier=Digi-Key, ComponentLink2URL=http://www.ti.com/lit/ds/symlink/sn75462.pdf?src-supplier=Digi-Key, ComponentLink3Description=http://www.ti.com/lit/ds/slrs021b/slrs021b.pdf?src-supplier=Avnet, ComponentLink3URL=http://www.ti.com/lit/ds/slrs021b/slrs021b.pdf?src-supplier=Avnet, Lead Free="Contains Lead", Manufacturer Part Number=SN75451BPSRG4, Mount="Surface Mount", Nominal Supply Current=65mA, Number of Drivers=2, Number of Outputs=2, Number of Pins=8, Packaging="Tape and Reel", Propagation Delay=25ns, Radiation Hardening=No, Stock 1=0, Supplier 1=Digi-Key, Turn-Off Delay Time=12ns, Turn-On Delay Time=8ns, Weight=0.004325oz
IC1 IC2 IC3: "Integrated Circuit", Manufacturer_Name="Texas Instruments", Mouser2 Part Number=595-CD40109BE, Datasheet Link=http://www.ti.com/lit/ds/symlink/cd40109b.pdf, Height=5.08mm, Manufacturer_Part_Number=CD40109BE, Mouser2 Price/Stock=https://www.mouser.com/Search/Refine.aspx?Keyword=595-CD40109BE
J1: "180 pin (120 + 60) HSEC8 socket, samtec", Digi-Key Part Number="SAM9083-ND & SAM9080-ND"
L1: "FIXED IND 4.7UH 3.2A 81.3 MOHM", Case/Package=2020, Current Rating=3.2A, DC Resistance (DCR)=81.3mR, Inductance=4.7uH, Inductance Tolerance=20%, Manufacturer="Vishay Dale", Max DC Current=3A, Max Operating Temperature=125°C, Min Operating Temperature=-55°C, Package Quantity=2000, Self Resonant Frequency=27MHz, Test Frequency=100kHz, Category="Inductors, Coils, Chokes", ComponentLink1Description=http://www.vishay.com/docs/34261/lp20bz11.pdf?src-supplier=Future+Electronics, ComponentLink1URL=http://www.vishay.com/docs/34261/lp20bz11.pdf?src-supplier=Future+Electronics, ComponentLink2Description=http://uk.rs-online.com/webdocs/102c/0900766b8102c92e.pdf?src-supplier=RSComponents, ComponentLink2URL=http://uk.rs-online.com/webdocs/102c/0900766b8102c92e.pdf?src-supplier=RSComponents, ComponentLink3Description=http://www.vishay.com/docs/34261/ihlp2020bz11.pdf?src-supplier=Digi-Key, ComponentLink3URL=http://www.vishay.com/docs/34261/ihlp2020bz11.pdf?src-supplier=Digi-Key, Core Material=Metal,Composite,Ferrite, Depth=5.43mm, Height=2mm, Height - Seated (Max)=0.079inch, Lead Free="Lead Free", Length=5.49mm, Manufacturer Part Number=IHLP2020BZER4R7M11, Military Standard=Not, Mount="Surface Mount", Number of Pins=2020, Packaging="Tape and Reel", Pricing 1="1=2.39, 10=2.208, 100=1.5456, 500=1.2512, 1000=1.1408 (USD)", Radiation Hardening=No, REACH SVHC=Unknown, RMS Current (Irms)=3.2A, Saturation Current=3A, Shielding=Shielded, Stock 1=25026, Supplier 1=Digi-Key, Termination=SMD/SMT, Tolerance=20%, Width=0.204inch
R1 R3 R4 R5 R6 R7 R8 R9 R10 R11 R12 R13 R14: library part CRCW0805360RFKEA, "Res Thick Film 0805 360 Ohm 1% 0.125W(1/8W) ±100ppm/C Molded SMD Automotive Paper T/R", Case Code (Imperial)=0805, Case Code (Metric)=2012, Manufacturer 1=Vishay, Max Operating Temperature=155°C, Max Power Dissipation=125mW, Min Operating Temperature=-55°C, Package Quantity=10, Resistance=360R, Supplier Part Number 1=541-360CCT-ND, Temperature Coefficient=100ppm/°C, Tolerance=1%, Voltage Rating=150V, Case/Package=0805, Category=Resistors, ComponentLink1Description=https://datasheet.ciiva.com/2467/dcrcwe3-2467773.pdf?src-supplier=Digi-Key, ComponentLink1URL=https://datasheet.ciiva.com/2467/dcrcwe3-2467773.pdf?src-supplier=Digi-Key, Composition="Thick Film", Contact Plating=Tin, Depth=1.25mm, Features="Automotive AEC-Q200", Height=0.45mm, Lead Free="Lead Free", Length=2mm, Manufacturer Part Number 1=CRCW0805360RFKEA, Military Standard=Not, Number of Pins=2, Number of Terminals=2, Number of Terminations=2, Packaging="Tape and Reel", Power Rating=125mW, Pricing 1="1=0.10000, 10=0.06200, 100=0.02540, 1000=0.01142, 2500=0.00991 (USD)", Radiation Hardening=No, REACH SVHC=Unknown, RoHS=Yes, Stock 1=2468, Supplier 1=Digi-Key, Termination=SMD/SMT, Voltage Rating (DC)=150V, Weight=0.000194oz, Width=0.049inch
R2: library part CRCW0805360RFKEA, "Res Thick Film 0805 360 Ohm 1% 0.125W(1/8W) ±100ppm/C Molded SMD Automotive Paper T/R", Case Code (Imperial)=0805, Case Code (Metric)=2012, Manufacturer 1=Vishay, Max Operating Temperature=155°C, Max Power Dissipation=125mW, Min Operating Temperature=-55°C, Package Quantity=10, Supplier Part Number 1=541-360CCT-ND, Temperature Coefficient=100ppm/°C, Tolerance=1%, Voltage Rating=150V, Case/Package=0805, Category=Resistors, ComponentLink1Description=https://datasheet.ciiva.com/2467/dcrcwe3-2467773.pdf?src-supplier=Digi-Key, ComponentLink1URL=https://datasheet.ciiva.com/2467/dcrcwe3-2467773.pdf?src-supplier=Digi-Key, Composition="Thick Film", Contact Plating=Tin, Depth=1.25mm, Features="Automotive AEC-Q200", Height=0.45mm, Lead Free="Lead Free", Length=2mm, Manufacturer Part Number 1=CRCW0805360RFKEA, Military Standard=Not, Number of Pins=2, Number of Terminals=2, Number of Terminations=2, Packaging="Tape and Reel", Power Rating=125mW, Pricing 1="1=0.10000, 10=0.06200, 100=0.02540, 1000=0.01142, 2500=0.00991 (USD)", Radiation Hardening=No, REACH SVHC=Unknown, Resistance=360R, RoHS=Yes, Stock 1=2468, Supplier 1=Digi-Key, Termination=SMD/SMT, Voltage Rating (DC)=150V, Weight=0.000194oz, Width=0.049inch
Rx1 Rx2 Rx3 Rx4 Rx5 Rx6 Rx7 Rx8 Rx9: "5 MBd High Performance Link Receiver for Industrial Applications Horizontal Package 1x4 RoHS Compliant", Manufacturer=Broadcom, Operating Supply Current=10mA, Manufacturer Part Number=HFBR-2521Z, Pricing 1="1=11.78, 10=10.666, 100=7.1104, 500=6.1105, 1000=5.7772, 2500=5.64388, 5000=5.555, 10000=5.4439 (USD)", REACH SVHC="No SVHC", Stock 1=3382, Supplier 1=Digi-Key, Wavelength=660nm
SPICKLA SPISIMOA SPISOMIA SPISTEA UARTRXA UARTRXA UARTTXA UARTTXA: Digi-Key Part Number=J500-ND
sw1: Digi-Key Part Number=EG1903-ND
TR1 TR2 TR3 TR4: library part ISO1050DUBR, "CAN 1Mbps 3.3V/5V 8-Pin SOP", Case/Package=SOP, Manufacturer="Texas Instruments", Max Operating Temperature=105°C, Max Power Dissipation=200mW, Max Supply Voltage=5.5V, Min Operating Temperature=-55°C, Min Supply Voltage=3V, Operating Supply Current=52mA, Operating Supply Voltage=5V, Output Current=70mA, Package Quantity=1, Working Voltage=1.2V, Category="Interface - Drivers, Receivers, Transceivers", ComponentLink1Description=http://www.ti.com/lit/ds/symlink/iso1050.pdf?src-supplier=Digi-Key, ComponentLink1URL=http://www.ti.com/lit/ds/symlink/iso1050.pdf?src-supplier=Digi-Key, ComponentLink2Description=http://www.farnell.com/datasheets/1972904.pdf?src-supplier=Element14, ComponentLink2URL=http://www.farnell.com/datasheets/1972904.pdf?src-supplier=Element14, ComponentLink3Description=https://www.verical.com/server-webapp/html/getDatasheet?partID=330373&src-supplier=Verical, ComponentLink3URL=https://www.verical.com/server-webapp/html/getDatasheet?partID=330373&src-supplier=Verical, ComponentLink4Description=http://sg.element14.com/webapp/wcs/stores/servlet/OpenCAD?catalogId=15001&langId=65&id=800000158048&storeId=10191&returnURL=http%3A%2F%2Fsg.element14.com%2Ftexas-instruments%2Fiso1050dubr%2Fic-can-transceiver-isolated-5v%2Fdp%2F1755712&src-supplier=Element14, ComponentLink4URL=http://sg.element14.com/webapp/wcs/stores/servlet/OpenCAD?catalogId=15001&langId=65&id=800000158048&storeId=10191&returnURL=http%3A%2F%2Fsg.element14.com%2Ftexas-instruments%2Fiso1050dubr%2Fic-can-transceiver-isolated-5v%2Fdp%2F1755712&src-supplier=Element14, ComponentLink5Description=http://www.produktinfo.conrad.com/datenblaetter/1100000-1199999/001187118-da-01-en-IC_TXRX_CAN_5V_ISO_ISO1050DUBR_SOP_8_TID.pdf?src-supplier=Conrad, ComponentLink5URL=http://www.produktinfo.conrad.com/datenblaetter/1100000-1199999/001187118-da-01-en-IC_TXRX_CAN_5V_ISO_ISO1050DUBR_SOP_8_TID.pdf?src-supplier=Conrad, ComponentLink6Description=http://datasheet.iiic.cc/texas_instruments/ISO1050DUBR.pdf?src-supplier=IIIC, ComponentLink6URL=http://datasheet.iiic.cc/texas_instruments/ISO1050DUBR.pdf?src-supplier=IIIC, Contact Plating=Gold, Data Rate=1Mbps, Lead Free="Lead Free", Manufacturer Part Number=ISO1050DUBR, Number of Channels=1, Number of Drivers=1, Number of Pins=8, Number of Receive Buffers=1, Number of Transceivers=1, Number of Transmit Buffers=1, Output Voltage=5V, Packaging="Tape and Reel", Polarity=Unidirectional, Pricing 1="1=4.9, 10=4.398, 25=4.158, 100=3.4188 (USD)", Propagation Delay=74ns, Radiation Hardening=No, REACH SVHC="No SVHC", Stock 1=11666, Supplier 1=Digi-Key, Termination=SMD/SMT, Weight=0.030018oz
Tx1 Tx2 Tx3 Tx4 Tx5 Tx6 Tx7 Tx8 Tx9: "AVAGO TECHNOLOGIES   HFBR-1527Z   TRANSMITTER, FIBRE OPTIC, VLINK", Capacitance=60pF, Forward Current=80mA, Forward Voltage=2.1V, Manufacturer="Broadcom Avago", Max Operating Temperature=70°C, Max Reverse Voltage (DC)=3V, Min Operating Temperature=0°C, Operating Supply Voltage=5V, Package Quantity=200, Category="Fiber Optic Transmitters", ComponentLink1Description=http://www.farnell.com/datasheets/67624.pdf?src-supplier=Element14, ComponentLink1URL=http://www.farnell.com/datasheets/67624.pdf?src-supplier=Element14, ComponentLink2Description=http://www1.futureelectronics.com/doc/AVAGO%20TECHNOLOGIES/HFBR-1527Z.pdf?src-supplier=Future+Electronics, ComponentLink2URL=http://www1.futureelectronics.com/doc/AVAGO%20TECHNOLOGIES/HFBR-1527Z.pdf?src-supplier=Future+Electronics, ComponentLink3Description=https://www.distrelec.biz/Web/Downloads/_t/ds/HFBR-0500Z_eng_tds.pdf?mime=application%2Fpdf&src-supplier=Distrelec, ComponentLink3URL=https://www.distrelec.biz/Web/Downloads/_t/ds/HFBR-0500Z_eng_tds.pdf?mime=application%2Fpdf&src-supplier=Distrelec, ComponentLink4Description=https://www.verical.com/server-webapp/html/getDatasheet?partID=95209&src-supplier=Verical, ComponentLink4URL=https://www.verical.com/server-webapp/html/getDatasheet?partID=95209&src-supplier=Verical, ComponentLink5Description=http://uk.rs-online.com/webdocs/0a20/0900766b80a20828.pdf?src-supplier=RSComponents, ComponentLink5URL=http://uk.rs-online.com/webdocs/0a20/0900766b80a20828.pdf?src-supplier=RSComponents, ComponentLink6Description=http://datasheet.iiic.cc/avago_technologies/HFBR-1527Z.pdf?src-supplier=IIIC, ComponentLink6URL=http://datasheet.iiic.cc/avago_technologies/HFBR-1527Z.pdf?src-supplier=IIIC, Data Rate=1Mbps, Fall Time=9ns, Height=7.71mm, Lead Free="Lead Free", Length=19.6mm, Manufacturer Part Number=HFBR-1527Z, Mount="Snap in,Through Hole", Number of Pins=6, Packaging=Rail/Tube, Pricing 1="1=12.01, 10=11.499, 100=7.6659, 500=6.89932, 1000=6.51602, 2500=6.38825, 5000=6.26049, 10000=6.23493 (USD)", Radiation Hardening=No, REACH SVHC="No SVHC", Reverse Voltage (DC)=5V, Rise Time=12ns, Stock 1=1407, Supplier 1=Digi-Key, Wavelength=650nm, Width=10.4mm
U1: "Linear Voltage Regulator IC Positive Fixed 1 Output 3.3V 600mA 8-SOIC-EP", Digi-Key Part Number=ADM7154ARDZ-3.3-R7CT-ND
U2 U4 U5 U6: Digi-Key Part Number=A97716-ND
U3: "Module DC-DC 5VIN 1-OUT 5V 0.2A 1W 4-Pin SIP Tube", Case/Package=SIP, Current - Output 1=200mA, Isolation Voltage=1kV, Manufacturer=Recom, Max Input Voltage=5.5V, Max Operating Temperature=85°C, Max Output Power=1W, Max Output Voltage=5V, Min Input Voltage=4.5V, Min Operating Temperature=-40°C, Package Quantity=42, Category="Power Supply", ComponentLink1Description=http://www.farnell.com/datasheets/2787770.pdf?src-supplier=Element14, ComponentLink1URL=http://www.farnell.com/datasheets/2787770.pdf?src-supplier=Element14, ComponentLink2Description=http://www.mouser.com/ds/2/468/ROE-766139.pdf?src-supplier=Mouser, ComponentLink2URL=http://www.mouser.com/ds/2/468/ROE-766139.pdf?src-supplier=Mouser, ComponentLink3Description=https://www.recom-power.com/pdf/Econoline/ROE.pdf?src-supplier=Digi-Key, ComponentLink3URL=https://www.recom-power.com/pdf/Econoline/ROE.pdf?src-supplier=Digi-Key, ComponentLink4Description=http://www.recom-international.com/pdf/Econoline/ROE.pdf?src-supplier=Future+Electronics, ComponentLink4URL=http://www.recom-international.com/pdf/Econoline/ROE.pdf?src-supplier=Future+Electronics, ComponentLink5Description=http://uk.rs-online.com/webdocs/1373/0900766b81373201.pdf?src-supplier=RSComponents, ComponentLink5URL=http://uk.rs-online.com/webdocs/1373/0900766b81373201.pdf?src-supplier=RSComponents, ComponentLink6Description=http://www.produktinfo.conrad.com/datenblaetter/675000-699999/676228-da-01-en-DC_DC_WANDLER_ROE_0505S.pdf?src-supplier=Conrad, ComponentLink6URL=http://www.produktinfo.conrad.com/datenblaetter/675000-699999/676228-da-01-en-DC_DC_WANDLER_ROE_0505S.pdf?src-supplier=Conrad, Depth=6mm, Efficiency=75%, Height=10mm, Isolation=Isolated, Lead Free="Lead Free", Length=11.5mm, Manufacturer Part Number=ROE-0505S, Max Input Voltage (DC)=5.5V, Max Output Current=200mA, Max Power Dissipation=1W, Min Input Voltage (DC)=4.5V, Mount="Through Hole", Nominal Input Voltage=5V, Nominal Output Voltage=5V, Number of Outputs=1, Number of Pins=4, Output Current=200mA, Output Power=1W, Output Voltage=5V, Packaging=Rail/Tube, Power Rating=1W, Pricing 1="1=2.64, 5=2.604, 10=2.567, 25=2.4916, 50=2.416, 100=2.3405, 250=2.265, 500=2.114 (USD)", REACH SVHC="No SVHC", Stock 1=4706, Supplier 1=Digi-Key, Voltage - Output 1=5V, Weight=1.4g, Width=6mm
USB1: "CONN MINI B USB R/A SMD", Color=Black, Contact Current Rating=1A, Flammability Rating="UL94 V-0", Manufacturer="TE Connectivity", Max Operating Temperature=85°C, Min Operating Temperature=-40°C, Package Quantity=700, Category="USB Connectors", Circuit Application=Power, ComponentLink1Description=http://www.te.com/commerce/DocumentDelivery/DDEController?Action=showdoc&DocId=Customer+Drawing%7F1734035%7FA%7Fpdf%7FEnglish%7FENG_CD_1734035_A.pdf&src-supplier=Avnet, ComponentLink1URL=http://www.te.com/commerce/DocumentDelivery/DDEController?Action=showdoc&DocId=Customer+Drawing%7F1734035%7FA%7Fpdf%7FEnglish%7FENG_CD_1734035_A.pdf&src-supplier=Avnet, ComponentLink2Description=http://www.te.com/commerce/DocumentDelivery/DDEController?Action=showdoc&DocId=Customer+Drawing%7F1734035%7FA%7Fpdf%7FEnglish%7FENG_CD_1734035_A.pdf&src-supplier=Avnet+Europe, ComponentLink2URL=http://www.te.com/commerce/DocumentDelivery/DDEController?Action=showdoc&DocId=Customer+Drawing%7F1734035%7FA%7Fpdf%7FEnglish%7FENG_CD_1734035_A.pdf&src-supplier=Avnet+Europe, ComponentLink3Description=http://www.mouser.com/ds/2/418/NG_CD_1734035_F-617298.pdf?src-supplier=Mouser, ComponentLink3URL=http://www.mouser.com/ds/2/418/NG_CD_1734035_F-617298.pdf?src-supplier=Mouser, ComponentLink4Description=http://www.te.com/commerce/DocumentDelivery/DDEController?Action=srchrtrv&DocNm=1734035&DocType=Customer+Drawing&DocLang=English&src-supplier=Digi-Key, ComponentLink4URL=http://www.te.com/commerce/DocumentDelivery/DDEController?Action=srchrtrv&DocNm=1734035&DocType=Customer+Drawing&DocLang=English&src-supplier=Digi-Key, Connector System=Cable-to-Board, Connector Type=Receptacle, Contact Material=Bronze, Contact Plating=Gold, ELV=Compliant, Gender=Receptacle, Housing Color=Black, Housing Material=Thermoplastic, Lead Free="Lead Free", Length=8.45mm, Manufacturer Part Number=1734035-3, Mount="Surface Mount,Horizontal", Number of Contacts=5, Number of Ports=1, Number of Positions=5, Number of Terminals=5, Orientation="Right Angle", Packaging="Tape and Reel", PCB Thickness=1.57mm, Pitch=0.8mm, Plating=Nickel, Plating Thickness=0.76um, Pricing 1="1=1.37, 10=1.239, 25=1.1636, 50=1.113, 100=1.0624, 250=0.96124 (USD)", Radiation Hardening=No, Stock 1=11601, Supplier 1=Digi-Key, Termination=SMD/SMT, Width=7.7mm

## Free pads (board coordinates)
  round 1.524 hole 4.242 unplated: M1(4.594,4.42) M2(4.594,122.53) M3(148.104,122.53) M4(147.469,4.42)

## Via types
v1: diameter 1, hole 0.5, Top Layer to Bottom Layer, 179 vias
v2: diameter 1.27, hole 0.711, Top Layer to Bottom Layer, 3 vias

## Nets (pads, with @x,y where several pads share a name; then routed paths per layer and width w, separated by ;. In a path a pad name is that pad's centre, name@x,y a point inside that pad or via, vN(x,y) a via of type N, cw(c..) or ccw(c..) an arc to the next point about the centre after c; other vN are vias at no path point)
+3V3: C6.1 C7.1 C9.1 C20.1 C27.1 C28.1 C30.1 C38.1 D1.2 IC1.16 IC2.16 IC3.16 R1.1 R8.1 TR1.1 TR2.1 TR3.1 TR4.1 U1.2 | length 233.8
  Top Layer w0.5: IC3.16@53.19,21.13 53.295,21.025 53.295,19.005 C20.1@53.4,18.9 ; C28.1@75,80.137 76.239,80.137 76.366,80.01 TR4.1@76.371,80.01 ; TR4.1@76.791,80.01 TR4.1@76.371,80.01 ; R8.1@77.05,87.1 77.05,83.769 76.296,83.015 76.296,80.085 TR4.1@76.371,80.01 ; C38.1@83.5,19.7 83.51,19.71 IC2.16@85.33,19.71 ; C9.1@104.025,79.223 104.204,79.223 105.322,78.105 TR2.1@106.172,78.105 ; IC1.16@115.17,37.39 115.291,37.511 115.711,37.511 116.14,37.94 116.54,37.94 116.8,38.2 C30.1@116.8,38.6
  Top Layer w1: C9.1@103.765,79.883 103.765,82.965 v1(103.8,83) ; v1(119.6,42.8) 120.3,42.1 D1.2@122.175,42.1
  Power Plane w1: v1(75,80) 85.3,80 v1(86.4,78.9) ; v1(103.9,80.1) 107.2,76.8 v1(115.4,76.8)
  Bottom Layer w0.5: v1(86.4,78.9) 86.4,79.967 86.518,80.085 87.368,80.085 87.979,80.696 88.443,80.696 C27.1@89.408,81.661 ; TR1.1@115.316,78.105 TR1.1@115.325,78.105 ; v1(115.4,76.8) 115.4,78.03 TR1.1@115.325,78.105 ; 117.028,47.939 121.181,47.939 ; C6.1@117.345,77.978 117.218,78.105 TR1.1@115.325,78.105
  Bottom Layer w1: IC3.16@53.19,21.13 54.8,22.74 82.3,22.74 IC2.16@85.33,19.71 91.074,19.71 97.324,13.459 115.459,13.459 117.6,15.6 117.6,34.96 IC1.16@115.17,37.39 119.504,41.724 119.504,42.704 v1(119.6,42.8) 118.052,44.348 117.752,44.348 116.3,45.8 116.3,47.211 117.028,47.939 ; C27.1@89.405,82.55 89.405,82.95 91.855,85.4 93.5,85.4 95.9,83 v1(103.8,83) ; R1.1@118.7,76.15 117.355,77.495 117.355,77.968 C6.1@117.345,77.978 117.345,78.378 118.876,79.909 121,79.909 129.109,71.8 129.109,55.277 126.099,52.267 C7.1@126.099,47.834 121.286,47.834 121.181,47.939
  other v1: 123.178,47.958
+5V: C2.1 C10.1 C11.1 C12.1 C13.1 C14.1 C16.1 C17.1 C19.1 C21.1 C22.1 C23.1 C24.1 C26.1 C31.1 C32.1 C33.1 C34.1 C35.1 C36.1 C37.1 C39.1 C40.1 C41.1 C42.1 C43.1 C44.1 C45.1 C46.1 C47.1 C48.1 C49.1 C50.1 C51.1 Dr1.1 Dr1.6 Dr1.8 Dr2.1 Dr2.6 Dr2.8 Dr3.1 Dr3.8 Dr4.1 Dr4.6 Dr4.8 Dr5.1 Dr5.6 Dr5.8 IC1.1 IC1.2 IC1.7 IC1.9 IC1.15 IC2.1 IC2.2 IC3.1 IC3.2 IC3.7 IC3.9 IC3.15 J1.48 J1.84 J1.98 J1.112 J1.158 J1.180 L1.1 R4.1 R5.1 R6.1 R7.1 R10.1 R11.1 R12.1 R13.1 R14.1 Rx1.3 Rx2.3 Rx3.3 Rx4.3 Rx5.3 Rx6.3 Rx7.3 Rx8.3 Rx9.3 sw1.2 U1.7 U1.8 | length 126.8
  Top Layer w0.5: v1(43.904,45.9) 43.931,45.873 44.932,45.873 Dr4.1@44.958,45.847 ; v1(44,47.4) C45.1@45.3,47.4 ; v1(49.9,62.5) 49.952,62.448 J1.48@49.952,59.661 ; v1(51.4,43.2) 51.488,43.288 52.339,43.288 Dr4.6@52.358,43.307 ; Dr4.8@52.358,45.847 52.383,45.847 52.429,45.893 52.429,46.429 v1(52.5,46.5) ; v1(62.4,45.9) 62.426,45.873 Dr5.1@63.224,45.873 ; C46.1@63.2,47.2 63.2,45.897 Dr5.1@63.224,45.873 ; Dr5.1@63.754,45.847 63.728,45.873 Dr5.1@63.224,45.873 ; J1.84@67.552,59.661 67.552,62.161 67.756,62.365 v1(67.756,62.5) ; v1(70.994,46.394) 71.074,46.315 71.074,45.893 71.12,45.847 Dr5.8@71.154,45.847 ; Dr5.6@71.154,43.307 71.158,43.303 72.596,43.303 v1(72.6,43.3) ; J1.98@73.152,59.661 73.152,62.452 v1(73.2,62.5) ; J1.112@78.752,59.661 v1(78.752,62.301) ; IC1.15@115.17,34.85 116.75,34.85 C31.1@116.9,34.7 ; v1(117.411,62.31) 117.42,62.301 J1.158@117.42,59.661 ; J1.180@126.22,59.661 126.22,61.937 126.318,62.035 v1(126.318,62.17) ; U1.7@128.755,47.958 U1.8@128.755,49.228 128.781,49.228 128.827,49.274 128.827,50.828 v1(128.9,50.9) ; C2.1@131.049,49.482 131.025,49.507 131.025,51.225 v1(131.062,51.262)
  Top Layer w1: IC3.9@35.41,21.13 35.435,21.105 35.435,19.465 35.99,18.91 35.99,18.51 36,18.5 C19.1@36.4,18.5 ; v1(49.3,81) 49.3,80.81 50.1,80.01 Dr3.1@50.258,80.01 ; v1(50.3,82.5) 51.49,82.5 51.5,82.51 C37.1@51.5,82.6 ; Dr3.8@57.658,80.01 57.668,80 v1(58.8,80) ; v1(58.9,95.8) 59.902,95.8 Dr1.1@59.944,95.758 ; v1(59,98.4) 60.19,98.4 60.2,98.39 C21.1@60.2,98.2 ; Dr1.6@67.344,93.218 67.426,93.3 v1(68.5,93.3) ; Dr1.8@67.344,95.758 67.4,95.814 v1(67.4,96.3) ; IC2.2@93.27,22.25 93.295,22.225 94.79,22.225 94.8,22.215 C43.1@94.8,22.1 ; Dr2.1@94.8,95 Dr2.1@94.804,95 ; v1(95,95.7) 95,95.196 Dr2.1@94.804,95 ; Dr2.1@95.123,94.996 95.119,95 Dr2.1@94.804,95 ; v1(96,97.9) 96.79,97.9 96.8,97.91 C22.1@96.8,98.1 ; v1(102.5,95.7) 102.5,95.019 Dr2.8@102.523,94.996 ; Dr2.6@102.523,92.456 102.579,92.4 v1(103.6,92.4) ; C17.1@148.5,59.7 148.6,59.6 v1(150.5,59.6)
  Top Layer w2: v1(136.7,47.7) 137.275,47.7 138.575,49 138.876,48.7 138.926,48.75 L1.1@138.926,48.895
  Power Plane w0.5: v1@78.7,62.2 78.752,62.252 v1(78.752,62.301) ; v1@126.1,62.1 126.248,62.1 v1(126.318,62.17)
  Bottom Layer w0.5: v1(4.5,26.7) 4.55,26.65 4.55,25.55 R12.1@4.6,25.5 ; R13.1@4.5,35.35 v1(4.5,36.7) ; v1(6.6,37.4) 6.6,36 C49.1@6.7,35.9 ; C39.1@50,59.1 50.4,59.1 v1(51.7,57.8) ; R10.1@50.625,122.525 50.675,122.575 51.725,122.575 v1(51.775,122.625) ; v1(65.365,58.065) 65.461,58.161 66.061,58.161 67.1,59.2 C33.1@67.5,59.2 ; C47.1@73.2,59.2 v1(73.2,62.5) ; C34.1@78.7,6.8 C34.1@78.73,6.83 ; Rx5.3@78.73,9.77 Rx5.3@78.76,9.8 ; v1(78.752,62.301) 78.752,59.248 C35.1@78.8,59.2 ; C14.1@88.7,7.1 C14.1@88.88,7.28 ; Rx4.3@88.88,9.62 Rx4.3@89.06,9.8 ; C13.1@99.2,7.1 C13.1@99.28,7.18 ; Rx3.3@99.28,9.72 Rx3.3@99.36,9.8 ; Rx2.3@109.695,9.775 Rx2.3@109.697,9.773 ; C12.1@109.697,7.003 C12.1@109.7,7 ; v1(115.3,58.1) 115.396,58.196 115.896,58.196 117.1,59.4 C26.1@117.5,59.4 ; Rx1.3@119.86,9.775 Rx1.3@119.88,9.755 ; C11.1@119.88,6.82 C11.1@119.9,6.8 ; v1(123.5,58.3) 123.635,58.3 123.875,58.54 124.84,58.54 C51.1@125.1,58.8
  Bottom Layer w1: R14.1@4.4,14.95 v1(4.4,16.4) ; R7.1@20.15,122.1 20.35,121.9 v1(21.7,121.9) ; C24.1@20.7,119.7 v1(22.1,119.7) ; C36.1@28.1,5.7 28.1,9.209 28.42,9.529 Rx6.3@28.42,9.8 ; R5.1@29.75,122.5 29.75,122.45 29.9,122.3 v1(31.2,122.3) ; C10.1@30.3,120.2 30.4,120.1 v1(31.5,120.1) ; Rx7.3@38.76,9.8 38.79,9.77 38.79,5.61 C40.1@38.8,5.6 ; R6.1@41.25,122.6 41.25,122.75 41.3,122.7 v1(42.5,122.7) ; C23.1@41.7,120.1 41.9,119.9 v1(43.1,119.9) ; Rx8.3@49.1,9.8 49.19,9.71 49.19,5.61 C44.1@49.2,5.6 ; C32.1@52.1,119.9 52.3,120.1 52.5,119.9 v1(53.6,119.9) ; C48.1@59.4,6.3 59.41,6.31 59.41,9.75 Rx9.3@59.46,9.8 ; R4.1@61.45,122.5 61.4,122.55 61.55,122.7 v1(62.9,122.7) ; C16.1@62,119.6 v1(63.2,119.6) ; C34.1@78.73,6.83 Rx5.3@78.73,9.77 ; C14.1@88.88,7.28 Rx4.3@88.88,9.62 ; C13.1@99.28,7.18 Rx3.3@99.28,9.72 ; C12.1@109.697,7.003 Rx2.3@109.697,9.773 ; C11.1@119.88,6.82 Rx1.3@119.88,9.755
  Bottom Layer w2: v1(4.7,47.5) 4.7,46.3 4.75,46.25 R11.1@4.8,46.25 ; C50.1@6.4,15.4 6.7,15.7 v1(6.7,16.9) ; C42.1@6.6,25.8 6.9,26.1 v1(6.9,27.3) ; C41.1@7.2,46.4 v1(7.2,47.7)
+5V/1: C1.1 C3.1 C18.1 C25.1 C29.1 TR1.8 TR2.8 TR3.8 TR4.8 U3.4 | length 96.9
  Top Layer w0.5: TR4.8@86.316,80.01 C29.1@89.024,80.01 89.024,80.41 88.096,81.338 88.096,81.604 v1(88,81.7) ; v1(115.2,79.184) 115.2,78.174 115.269,78.105 TR2.8@115.272,78.105 116.122,78.105 117.212,79.195 117.212,80.004 C3.1@117.472,80.264
  Top Layer w1: v1(142.8,64.6) 145.652,64.6 U3.4@145.682,64.63 145.742,64.69 148.19,64.69 C18.1@148.2,64.7
  Power Plane w1: v1(77.3,81.3) 77.7,81.7 v1(88,81.7) 104.4,81.7 v1(106.2,79.9) 106.916,79.184 v1(115.2,79.184) 128.216,79.184 v1(142.8,64.6)
  Bottom Layer w0.5: C25.1@74.93,82.169 75.19,81.909 75.19,81.313 76.493,80.01 TR3.8@77.343,80.01 77.3,80.053 v1(77.3,81.3) ; C1.1@103.759,78.105 TR1.8@106.216,78.105 106.216,79.884 v1(106.2,79.9)
DACA: DACA.1 J1.9 | length 21.6
  Top Layer w0.5: DACA.1@17.96,47.9 26.843,56.783 30.485,56.783 31.067,57.365 34.411,57.365 34.706,57.07 34.706,56.657 34.752,56.611 J1.9@34.752,56.261
DACB: DACB.1 J1.11 | length 13.9
  Top Layer w0.5: DACB.1@26.46,48.1 29.479,51.119 32.87,51.119 35.552,53.801 J1.11@35.552,56.261